# EAGLE board SparkFun_LED_Array_8x7_Panel_v11 (EAGLE 7.5.0), part 1 of 8
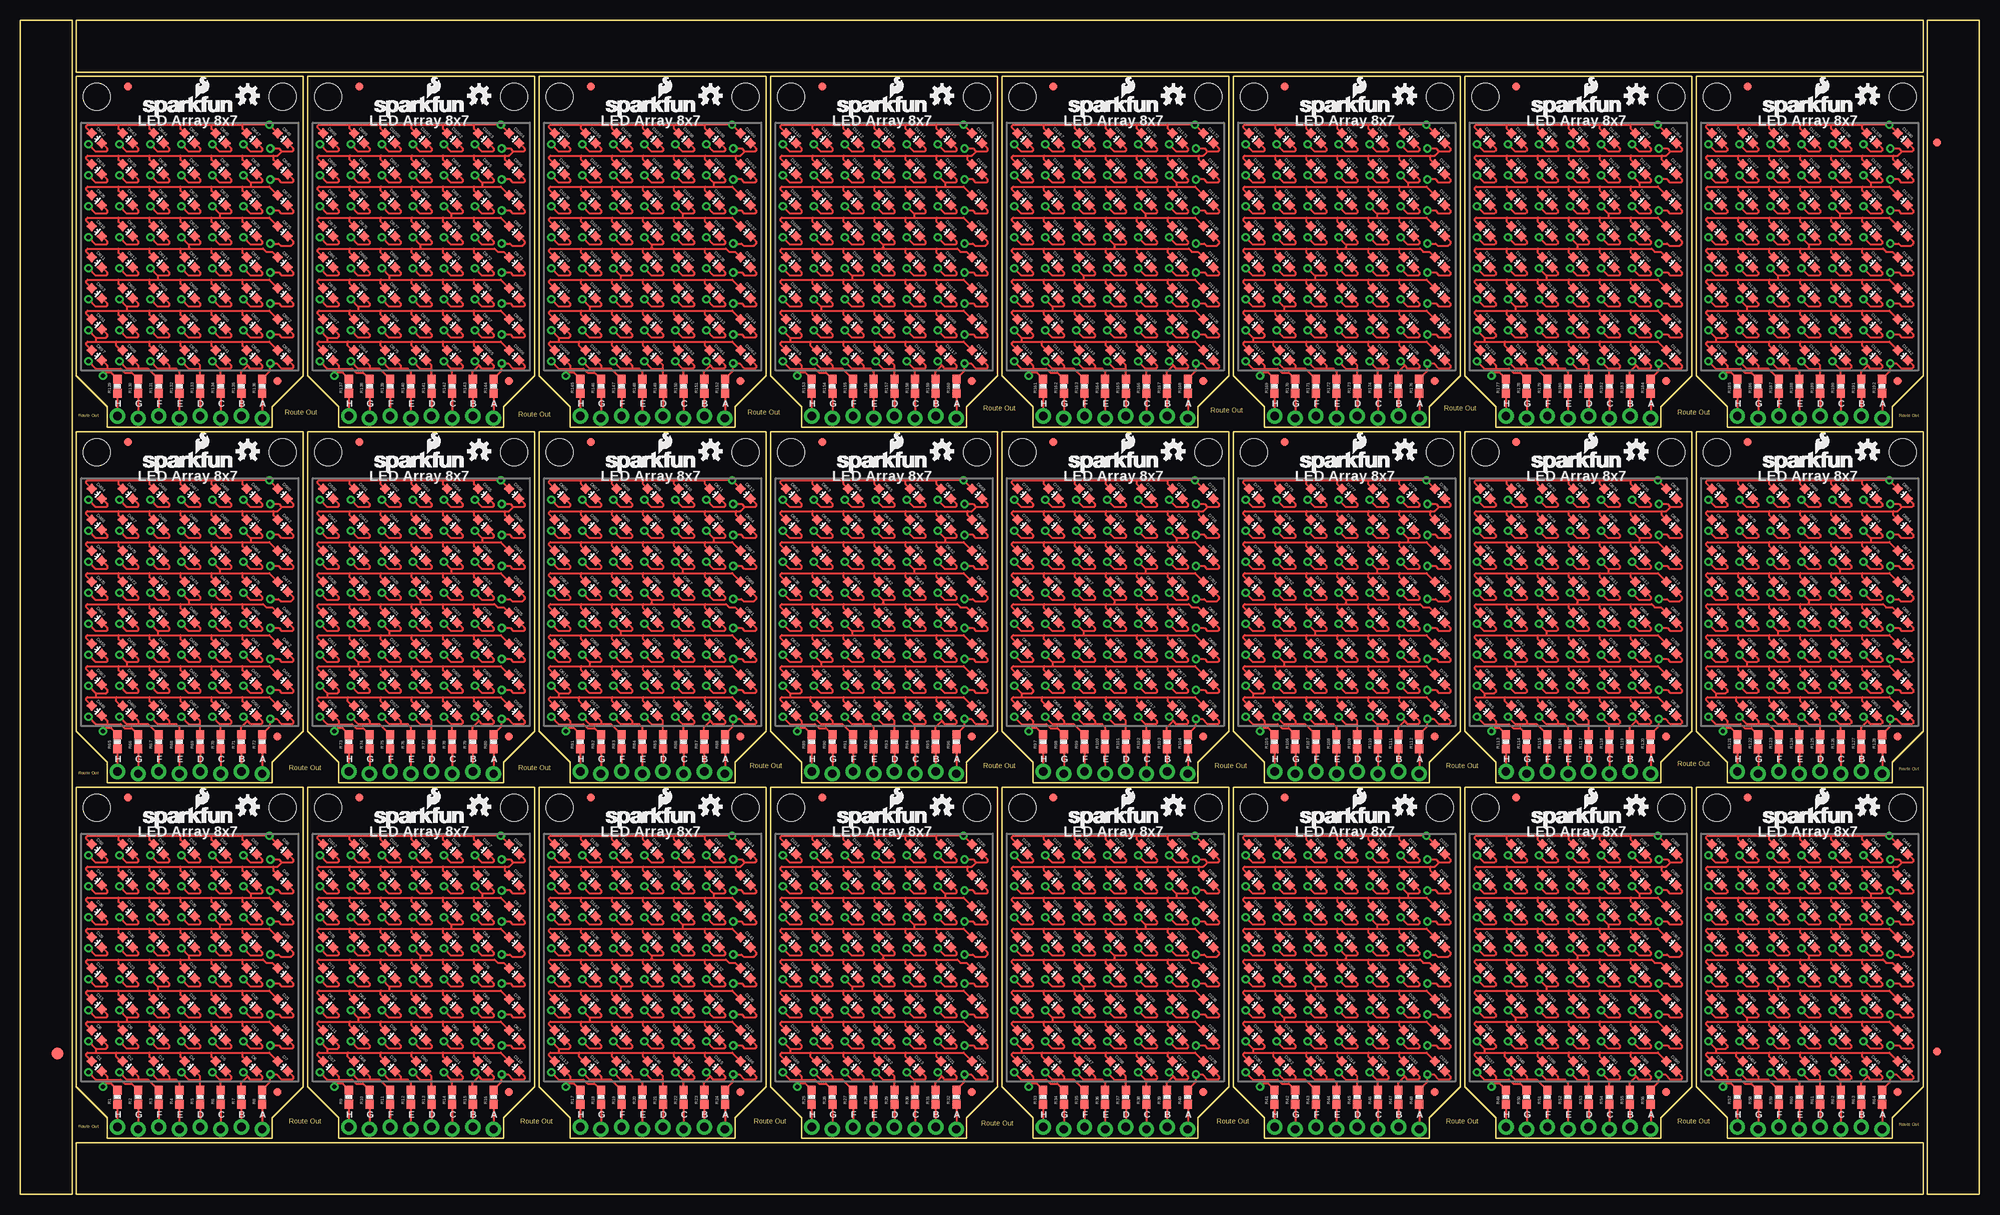
[diagram p0: board, top side]
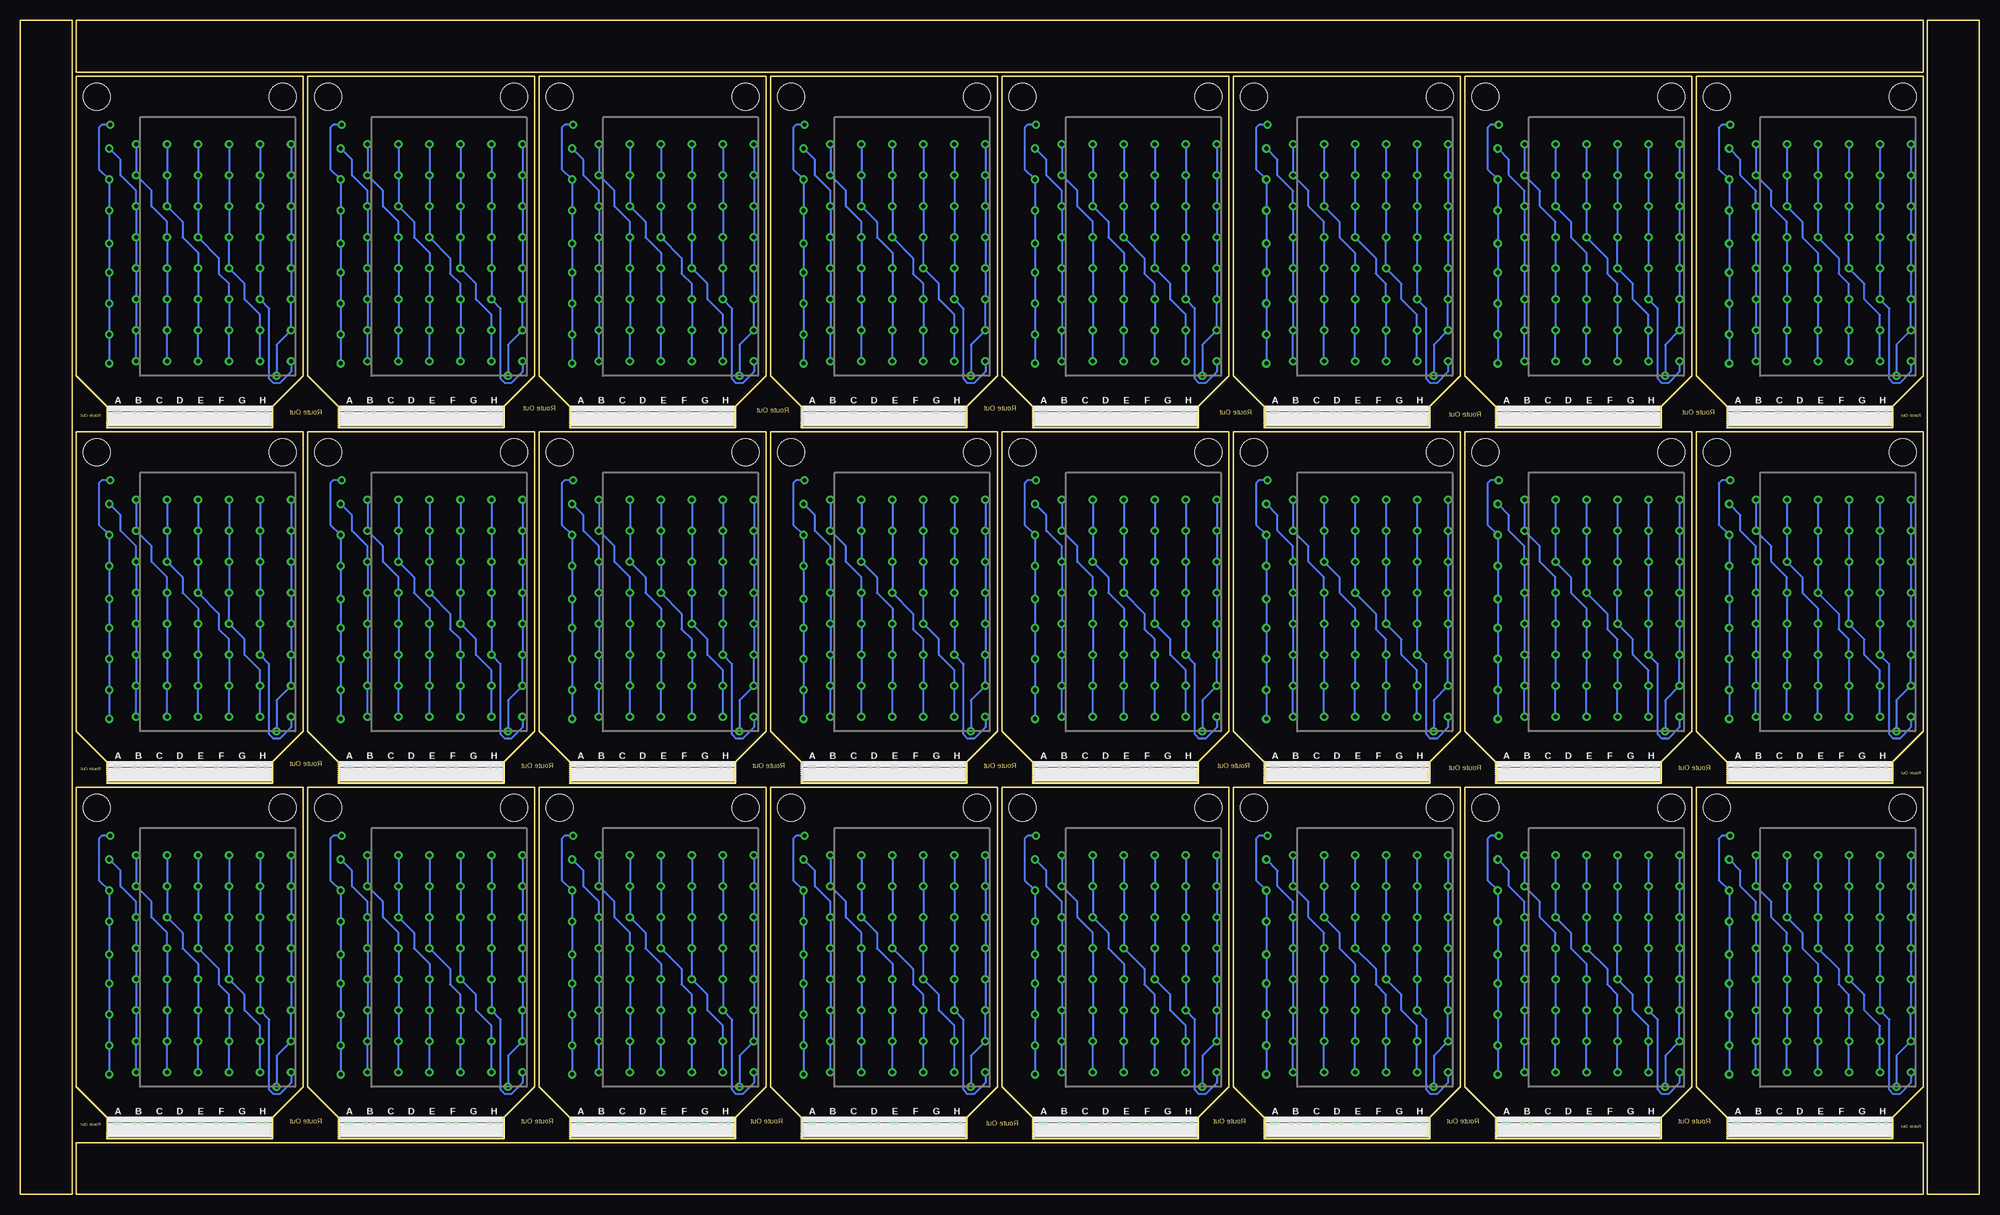
[diagram p1: board, bottom side, seen from below]

Size 240.79 x 144.27 mm. Coordinates in mm from the lower left corner, seen from the top.
Outline: 216 segments
Copper layers (1*16): Top 0.035mm / dielectric 1.5mm / Bottom 0.035mm
Design rules "SparkFun-2-layer-STANDARD": minimum track width 10mil, minimum drill 20mil, track to track 10mil, track to pad 8mil, pad to pad 8mil, via to via 10mil, smd to smd 8mil, copper to edge 8mil, drill to drill 8mil, minimum pad ring 10mil, minimum via ring 10mil, stop-mask expansion 4mil, vias tented up to drill 20mil, thermal gap 10mil

## Footprints (pad centres in the part's own frame; a part is rotated, then mirrored left to right if it is on the bottom)
LED-0603 = smd 1 x 1: A 0,-0.877; C 0,0.877
FIDUCIAL-1.5X3 = smd 1.5 x 1.5: 1 0,0
FIDUCIAL-1X2 = smd 1 x 1: 1 0,0
1X08_LOCK_NO_SILK = drill 1.016 pad 1.88: 1 0,0.127; 2 2.54,-0.127; 3 5.08,0.127; 4 7.62,-0.127; 5 10.16,0.127; 6 12.7,-0.127; 7 15.24,0.127; 8 17.78,-0.127
0603-RES = smd 1.1 x 1: 1 -0.85,0; 2 0.85,0
STAND-OFF = hole 3.302: 0,0

## Placement (x,y rotation side)
D1  RED  [LED-0603]  9.4,15.75 225 top
D2  RED  [LED-0603]  13.21,15.75 225 top
D3  RED  [LED-0603]  17.02,15.75 225 top
D4  RED  [LED-0603]  20.83,15.75 225 top
D5  RED  [LED-0603]  24.64,15.75 225 top
D6  RED  [LED-0603]  28.45,15.75 225 top
D7  RED  [LED-0603]  32.26,15.75 225 top
D8  RED  [LED-0603]  9.4,19.56 225 top
D9  RED  [LED-0603]  13.21,19.56 225 top
D10  RED  [LED-0603]  17.02,19.56 225 top
D11  RED  [LED-0603]  20.83,19.56 225 top
D12  RED  [LED-0603]  24.64,19.56 225 top
D13  RED  [LED-0603]  28.45,19.56 225 top
D14  RED  [LED-0603]  32.26,19.56 225 top
D15  RED  [LED-0603]  9.4,23.37 225 top
D16  RED  [LED-0603]  13.21,23.37 225 top
D17  RED  [LED-0603]  17.02,23.37 225 top
D18  RED  [LED-0603]  20.83,23.37 225 top
D19  RED  [LED-0603]  24.64,23.37 225 top
D20  RED  [LED-0603]  28.45,23.37 225 top
D21  RED  [LED-0603]  32.26,23.37 225 top
D22  RED  [LED-0603]  9.4,27.18 225 top
D23  RED  [LED-0603]  13.21,27.18 225 top
D24  RED  [LED-0603]  17.02,27.18 225 top
D25  RED  [LED-0603]  20.83,27.18 225 top
D26  RED  [LED-0603]  24.64,27.18 225 top
D27  RED  [LED-0603]  28.45,27.18 225 top
D28  RED  [LED-0603]  32.26,27.18 225 top
D29  RED  [LED-0603]  9.4,30.99 225 top
D30  RED  [LED-0603]  13.21,30.99 225 top
D31  RED  [LED-0603]  17.02,30.99 225 top
D32  RED  [LED-0603]  20.83,30.99 225 top
D33  RED  [LED-0603]  24.64,30.99 225 top
D34  RED  [LED-0603]  28.45,30.99 225 top
D35  RED  [LED-0603]  32.26,30.99 225 top
D36  RED  [LED-0603]  9.4,34.8 225 top
D37  RED  [LED-0603]  13.21,34.8 225 top
D38  RED  [LED-0603]  17.02,34.8 225 top
D39  RED  [LED-0603]  20.83,34.8 225 top
D40  RED  [LED-0603]  24.64,34.8 225 top
D41  RED  [LED-0603]  28.45,34.8 225 top
D42  RED  [LED-0603]  32.26,34.8 225 top
D43  RED  [LED-0603]  9.4,38.61 225 top
D44  RED  [LED-0603]  13.21,38.61 225 top
D45  RED  [LED-0603]  17.02,38.61 225 top
D46  RED  [LED-0603]  20.83,38.61 225 top
D47  RED  [LED-0603]  24.64,38.61 225 top
D48  RED  [LED-0603]  28.45,38.61 225 top
D49  RED  [LED-0603]  32.26,38.61 225 top
D50  RED  [LED-0603]  9.4,42.42 225 top
D51  RED  [LED-0603]  13.21,42.42 225 top
D52  RED  [LED-0603]  17.02,42.42 225 top
D53  RED  [LED-0603]  20.83,42.42 225 top
D54  RED  [LED-0603]  24.64,42.42 225 top
D55  RED  [LED-0603]  28.45,42.42 225 top
D56  RED  [LED-0603]  32.26,42.42 225 top
D57  RED  [LED-0603]  37.85,15.75 225 top
D58  RED  [LED-0603]  45.47,19.56 225 top
D59  RED  [LED-0603]  49.28,19.56 225 top
D60  RED  [LED-0603]  53.09,19.56 225 top
D61  RED  [LED-0603]  56.9,19.56 225 top
D62  RED  [LED-0603]  60.71,19.56 225 top
D63  RED  [LED-0603]  37.85,23.37 225 top
D64  RED  [LED-0603]  41.66,23.37 225 top
D65  RED  [LED-0603]  45.47,23.37 225 top
D66  RED  [LED-0603]  49.28,23.37 225 top
D67  RED  [LED-0603]  53.09,23.37 225 top
D68  RED  [LED-0603]  41.66,15.75 225 top
D69  RED  [LED-0603]  56.9,23.37 225 top
D70  RED  [LED-0603]  60.71,23.37 225 top
D71  RED  [LED-0603]  37.85,27.18 225 top
D72  RED  [LED-0603]  41.66,27.18 225 top
D73  RED  [LED-0603]  45.47,27.18 225 top
D74  RED  [LED-0603]  49.28,27.18 225 top
D75  RED  [LED-0603]  53.09,27.18 225 top
D76  RED  [LED-0603]  56.9,27.18 225 top
D77  RED  [LED-0603]  60.71,27.18 225 top
D78  RED  [LED-0603]  37.85,30.99 225 top
D79  RED  [LED-0603]  45.47,15.75 225 top
D80  RED  [LED-0603]  41.66,30.99 225 top
D81  RED  [LED-0603]  45.47,30.99 225 top
D82  RED  [LED-0603]  49.28,30.99 225 top
D83  RED  [LED-0603]  53.09,30.99 225 top
D84  RED  [LED-0603]  56.9,30.99 225 top
D85  RED  [LED-0603]  60.71,30.99 225 top
D86  RED  [LED-0603]  37.85,34.8 225 top
D87  RED  [LED-0603]  41.66,34.8 225 top
D88  RED  [LED-0603]  45.47,34.8 225 top
D89  RED  [LED-0603]  49.28,34.8 225 top
D90  RED  [LED-0603]  49.28,15.75 225 top
D91  RED  [LED-0603]  53.09,34.8 225 top
D92  RED  [LED-0603]  56.9,34.8 225 top
D93  RED  [LED-0603]  60.71,34.8 225 top
D94  RED  [LED-0603]  37.85,38.61 225 top
D95  RED  [LED-0603]  41.66,38.61 225 top
D96  RED  [LED-0603]  45.47,38.61 225 top
D97  RED  [LED-0603]  49.28,38.61 225 top
D98  RED  [LED-0603]  53.09,38.61 225 top
D99  RED  [LED-0603]  56.9,38.61 225 top
D100  RED  [LED-0603]  60.71,38.61 225 top
D101  RED  [LED-0603]  53.09,15.75 225 top
D102  RED  [LED-0603]  37.85,42.42 225 top
D103  RED  [LED-0603]  41.66,42.42 225 top
D104  RED  [LED-0603]  45.47,42.42 225 top
D105  RED  [LED-0603]  49.28,42.42 225 top
D106  RED  [LED-0603]  53.09,42.42 225 top
D107  RED  [LED-0603]  56.9,42.42 225 top
D108  RED  [LED-0603]  60.71,42.42 225 top
D109  RED  [LED-0603]  56.9,15.75 225 top
D110  RED  [LED-0603]  60.71,15.75 225 top
D111  RED  [LED-0603]  37.85,19.56 225 top
D112  RED  [LED-0603]  41.66,19.56 225 top
D113  RED  [LED-0603]  66.29,15.75 225 top
D114  RED  [LED-0603]  73.91,19.56 225 top
D115  RED  [LED-0603]  77.72,19.56 225 top
D116  RED  [LED-0603]  81.53,19.56 225 top
D117  RED  [LED-0603]  85.34,19.56 225 top
D118  RED  [LED-0603]  89.15,19.56 225 top
D119  RED  [LED-0603]  66.29,23.37 225 top
D120  RED  [LED-0603]  70.1,23.37 225 top
D121  RED  [LED-0603]  73.91,23.37 225 top
D122  RED  [LED-0603]  77.72,23.37 225 top
D123  RED  [LED-0603]  81.53,23.37 225 top
D124  RED  [LED-0603]  70.1,15.75 225 top
D125  RED  [LED-0603]  85.34,23.37 225 top
D126  RED  [LED-0603]  89.15,23.37 225 top
D127  RED  [LED-0603]  66.29,27.18 225 top
D128  RED  [LED-0603]  70.1,27.18 225 top
D129  RED  [LED-0603]  73.91,27.18 225 top
D130  RED  [LED-0603]  77.72,27.18 225 top
D131  RED  [LED-0603]  81.53,27.18 225 top
D132  RED  [LED-0603]  85.34,27.18 225 top
D133  RED  [LED-0603]  89.15,27.18 225 top
D134  RED  [LED-0603]  66.29,30.99 225 top
D135  RED  [LED-0603]  73.91,15.75 225 top
D136  RED  [LED-0603]  70.1,30.99 225 top
D137  RED  [LED-0603]  73.91,30.99 225 top
D138  RED  [LED-0603]  77.72,30.99 225 top
D139  RED  [LED-0603]  81.53,30.99 225 top
D140  RED  [LED-0603]  85.34,30.99 225 top
D141  RED  [LED-0603]  89.15,30.99 225 top
D142  RED  [LED-0603]  66.29,34.8 225 top
D143  RED  [LED-0603]  70.1,34.8 225 top
D144  RED  [LED-0603]  73.91,34.8 225 top
D145  RED  [LED-0603]  77.72,34.8 225 top
D146  RED  [LED-0603]  77.72,15.75 225 top
D147  RED  [LED-0603]  81.53,34.8 225 top
D148  RED  [LED-0603]  85.34,34.8 225 top
D149  RED  [LED-0603]  89.15,34.8 225 top
D150  RED  [LED-0603]  66.29,38.61 225 top
D151  RED  [LED-0603]  70.1,38.61 225 top
D152  RED  [LED-0603]  73.91,38.61 225 top
D153  RED  [LED-0603]  77.72,38.61 225 top
D154  RED  [LED-0603]  81.53,38.61 225 top
D155  RED  [LED-0603]  85.34,38.61 225 top
D156  RED  [LED-0603]  89.15,38.61 225 top
D157  RED  [LED-0603]  81.53,15.75 225 top
D158  RED  [LED-0603]  66.29,42.42 225 top
D159  RED  [LED-0603]  70.1,42.42 225 top
D160  RED  [LED-0603]  73.91,42.42 225 top
D161  RED  [LED-0603]  77.72,42.42 225 top
D162  RED  [LED-0603]  81.53,42.42 225 top
D163  RED  [LED-0603]  85.34,42.42 225 top
D164  RED  [LED-0603]  89.15,42.42 225 top
D165  RED  [LED-0603]  85.34,15.75 225 top
D166  RED  [LED-0603]  89.15,15.75 225 top
D167  RED  [LED-0603]  66.29,19.56 225 top
D168  RED  [LED-0603]  70.1,19.56 225 top
D169  RED  [LED-0603]  94.74,15.75 225 top
D170  RED  [LED-0603]  102.36,19.56 225 top
D171  RED  [LED-0603]  106.17,19.56 225 top
D172  RED  [LED-0603]  109.98,19.56 225 top
D173  RED  [LED-0603]  113.79,19.56 225 top
D174  RED  [LED-0603]  117.6,19.56 225 top
D175  RED  [LED-0603]  94.74,23.37 225 top
D176  RED  [LED-0603]  98.55,23.37 225 top
D177  RED  [LED-0603]  102.36,23.37 225 top
D178  RED  [LED-0603]  106.17,23.37 225 top
D179  RED  [LED-0603]  109.98,23.37 225 top
D180  RED  [LED-0603]  98.55,15.75 225 top
D181  RED  [LED-0603]  113.79,23.37 225 top
D182  RED  [LED-0603]  117.6,23.37 225 top
D183  RED  [LED-0603]  94.74,27.18 225 top
D184  RED  [LED-0603]  98.55,27.18 225 top
D185  RED  [LED-0603]  102.36,27.18 225 top
D186  RED  [LED-0603]  106.17,27.18 225 top
D187  RED  [LED-0603]  109.98,27.18 225 top
D188  RED  [LED-0603]  113.79,27.18 225 top
D189  RED  [LED-0603]  117.6,27.18 225 top
D190  RED  [LED-0603]  94.74,30.99 225 top
D191  RED  [LED-0603]  102.36,15.75 225 top
D192  RED  [LED-0603]  98.55,30.99 225 top
D193  RED  [LED-0603]  102.36,30.99 225 top
D194  RED  [LED-0603]  106.17,30.99 225 top
D195  RED  [LED-0603]  109.98,30.99 225 top
D196  RED  [LED-0603]  113.79,30.99 225 top
D197  RED  [LED-0603]  117.6,30.99 225 top
D198  RED  [LED-0603]  94.74,34.8 225 top
D199  RED  [LED-0603]  98.55,34.8 225 top
D200  RED  [LED-0603]  102.36,34.8 225 top
D201  RED  [LED-0603]  106.17,34.8 225 top
D202  RED  [LED-0603]  106.17,15.75 225 top
D203  RED  [LED-0603]  109.98,34.8 225 top
D204  RED  [LED-0603]  113.79,34.8 225 top
D205  RED  [LED-0603]  117.6,34.8 225 top
D206  RED  [LED-0603]  94.74,38.61 225 top
D207  RED  [LED-0603]  98.55,38.61 225 top
D208  RED  [LED-0603]  102.36,38.61 225 top
D209  RED  [LED-0603]  106.17,38.61 225 top
D210  RED  [LED-0603]  109.98,38.61 225 top
D211  RED  [LED-0603]  113.79,38.61 225 top
D212  RED  [LED-0603]  117.6,38.61 225 top
D213  RED  [LED-0603]  109.98,15.75 225 top
D214  RED  [LED-0603]  94.74,42.42 225 top
D215  RED  [LED-0603]  98.55,42.42 225 top
D216  RED  [LED-0603]  102.36,42.42 225 top
D217  RED  [LED-0603]  106.17,42.42 225 top
D218  RED  [LED-0603]  109.98,42.42 225 top
D219  RED  [LED-0603]  113.79,42.42 225 top
D220  RED  [LED-0603]  117.6,42.42 225 top
D221  RED  [LED-0603]  113.79,15.75 225 top
D222  RED  [LED-0603]  117.6,15.75 225 top
D223  RED  [LED-0603]  94.74,19.56 225 top
D224  RED  [LED-0603]  98.55,19.56 225 top
D225  RED  [LED-0603]  123.19,15.75 225 top
D226  RED  [LED-0603]  130.81,19.56 225 top
D227  RED  [LED-0603]  134.62,19.56 225 top
D228  RED  [LED-0603]  138.43,19.56 225 top
D229  RED  [LED-0603]  142.24,19.56 225 top
D230  RED  [LED-0603]  146.05,19.56 225 top
D231  RED  [LED-0603]  123.19,23.37 225 top
D232  RED  [LED-0603]  127,23.37 225 top
D233  RED  [LED-0603]  130.81,23.37 225 top
D234  RED  [LED-0603]  134.62,23.37 225 top
D235  RED  [LED-0603]  138.43,23.37 225 top
D236  RED  [LED-0603]  127,15.75 225 top
D237  RED  [LED-0603]  142.24,23.37 225 top
D238  RED  [LED-0603]  146.05,23.37 225 top
D239  RED  [LED-0603]  123.19,27.18 225 top
D240  RED  [LED-0603]  127,27.18 225 top
D241  RED  [LED-0603]  130.81,27.18 225 top
D242  RED  [LED-0603]  134.62,27.18 225 top
D243  RED  [LED-0603]  138.43,27.18 225 top
D244  RED  [LED-0603]  142.24,27.18 225 top
D245  RED  [LED-0603]  146.05,27.18 225 top
D246  RED  [LED-0603]  123.19,30.99 225 top
D247  RED  [LED-0603]  130.81,15.75 225 top
D248  RED  [LED-0603]  127,30.99 225 top
D249  RED  [LED-0603]  130.81,30.99 225 top
D250  RED  [LED-0603]  134.62,30.99 225 top
D251  RED  [LED-0603]  138.43,30.99 225 top
D252  RED  [LED-0603]  142.24,30.99 225 top
D253  RED  [LED-0603]  146.05,30.99 225 top
D254  RED  [LED-0603]  123.19,34.8 225 top
D255  RED  [LED-0603]  127,34.8 225 top
D256  RED  [LED-0603]  130.81,34.8 225 top
D257  RED  [LED-0603]  134.62,34.8 225 top
D258  RED  [LED-0603]  134.62,15.75 225 top
D259  RED  [LED-0603]  138.43,34.8 225 top
D260  RED  [LED-0603]  142.24,34.8 225 top
D261  RED  [LED-0603]  146.05,34.8 225 top
D262  RED  [LED-0603]  123.19,38.61 225 top
D263  RED  [LED-0603]  127,38.61 225 top
D264  RED  [LED-0603]  130.81,38.61 225 top
D265  RED  [LED-0603]  134.62,38.61 225 top
D266  RED  [LED-0603]  138.43,38.61 225 top
D267  RED  [LED-0603]  142.24,38.61 225 top
D268  RED  [LED-0603]  146.05,38.61 225 top
D269  RED  [LED-0603]  138.43,15.75 225 top
D270  RED  [LED-0603]  123.19,42.42 225 top
D271  RED  [LED-0603]  127,42.42 225 top
D272  RED  [LED-0603]  130.81,42.42 225 top
D273  RED  [LED-0603]  134.62,42.42 225 top
D274  RED  [LED-0603]  138.43,42.42 225 top
D275  RED  [LED-0603]  142.24,42.42 225 top
D276  RED  [LED-0603]  146.05,42.42 225 top
D277  RED  [LED-0603]  142.24,15.75 225 top
D278  RED  [LED-0603]  146.05,15.75 225 top
D279  RED  [LED-0603]  123.19,19.56 225 top
D280  RED  [LED-0603]  127,19.56 225 top
D281  RED  [LED-0603]  151.64,15.75 225 top
D282  RED  [LED-0603]  159.26,19.56 225 top
D283  RED  [LED-0603]  163.07,19.56 225 top
D284  RED  [LED-0603]  166.88,19.56 225 top
D285  RED  [LED-0603]  170.69,19.56 225 top
D286  RED  [LED-0603]  174.5,19.56 225 top
D287  RED  [LED-0603]  151.64,23.37 225 top
D288  RED  [LED-0603]  155.45,23.37 225 top
D289  RED  [LED-0603]  159.26,23.37 225 top
D290  RED  [LED-0603]  163.07,23.37 225 top
D291  RED  [LED-0603]  166.88,23.37 225 top
D292  RED  [LED-0603]  155.45,15.75 225 top
D293  RED  [LED-0603]  170.69,23.37 225 top
D294  RED  [LED-0603]  174.5,23.37 225 top
D295  RED  [LED-0603]  151.64,27.18 225 top
D296  RED  [LED-0603]  155.45,27.18 225 top
D297  RED  [LED-0603]  159.26,27.18 225 top
D298  RED  [LED-0603]  163.07,27.18 225 top
D299  RED  [LED-0603]  166.88,27.18 225 top
D300  RED  [LED-0603]  170.69,27.18 225 top
D301  RED  [LED-0603]  174.5,27.18 225 top
D302  RED  [LED-0603]  151.64,30.99 225 top
D303  RED  [LED-0603]  159.26,15.75 225 top
D304  RED  [LED-0603]  155.45,30.99 225 top
D305  RED  [LED-0603]  159.26,30.99 225 top
D306  RED  [LED-0603]  163.07,30.99 225 top
D307  RED  [LED-0603]  166.88,30.99 225 top
D308  RED  [LED-0603]  170.69,30.99 225 top
D309  RED  [LED-0603]  174.5,30.99 225 top
D310  RED  [LED-0603]  151.64,34.8 225 top
D311  RED  [LED-0603]  155.45,34.8 225 top
D312  RED  [LED-0603]  159.26,34.8 225 top
D313  RED  [LED-0603]  163.07,34.8 225 top
D314  RED  [LED-0603]  163.07,15.75 225 top
D315  RED  [LED-0603]  166.88,34.8 225 top
D316  RED  [LED-0603]  170.69,34.8 225 top
D317  RED  [LED-0603]  174.5,34.8 225 top
D318  RED  [LED-0603]  151.64,38.61 225 top
D319  RED  [LED-0603]  155.45,38.61 225 top
D320  RED  [LED-0603]  159.26,38.61 225 top
D321  RED  [LED-0603]  163.07,38.61 225 top
D322  RED  [LED-0603]  166.88,38.61 225 top
D323  RED  [LED-0603]  170.69,38.61 225 top
D324  RED  [LED-0603]  174.5,38.61 225 top
D325  RED  [LED-0603]  166.88,15.75 225 top
D326  RED  [LED-0603]  151.64,42.42 225 top
D327  RED  [LED-0603]  155.45,42.42 225 top
D328  RED  [LED-0603]  159.26,42.42 225 top
D329  RED  [LED-0603]  163.07,42.42 225 top
D330  RED  [LED-0603]  166.88,42.42 225 top
D331  RED  [LED-0603]  170.69,42.42 225 top
D332  RED  [LED-0603]  174.5,42.42 225 top
D333  RED  [LED-0603]  170.69,15.75 225 top
D334  RED  [LED-0603]  174.5,15.75 225 top
D335  RED  [LED-0603]  151.64,19.56 225 top
D336  RED  [LED-0603]  155.45,19.56 225 top
D337  RED  [LED-0603]  180.09,15.75 225 top
D338  RED  [LED-0603]  187.71,19.56 225 top
D339  RED  [LED-0603]  191.52,19.56 225 top
D340  RED  [LED-0603]  195.33,19.56 225 top
D341  RED  [LED-0603]  199.14,19.56 225 top
D342  RED  [LED-0603]  202.95,19.56 225 top
D343  RED  [LED-0603]  180.09,23.37 225 top
D344  RED  [LED-0603]  183.9,23.37 225 top
D345  RED  [LED-0603]  187.71,23.37 225 top
D346  RED  [LED-0603]  191.52,23.37 225 top
D347  RED  [LED-0603]  195.33,23.37 225 top
D348  RED  [LED-0603]  183.9,15.75 225 top
D349  RED  [LED-0603]  199.14,23.37 225 top
D350  RED  [LED-0603]  202.95,23.37 225 top
D351  RED  [LED-0603]  180.09,27.18 225 top
D352  RED  [LED-0603]  183.9,27.18 225 top
D353  RED  [LED-0603]  187.71,27.18 225 top
D354  RED  [LED-0603]  191.52,27.18 225 top
D355  RED  [LED-0603]  195.33,27.18 225 top
D356  RED  [LED-0603]  199.14,27.18 225 top
D357  RED  [LED-0603]  202.95,27.18 225 top
D358  RED  [LED-0603]  180.09,30.99 225 top
D359  RED  [LED-0603]  187.71,15.75 225 top
D360  RED  [LED-0603]  183.9,30.99 225 top
D361  RED  [LED-0603]  187.71,30.99 225 top
D362  RED  [LED-0603]  191.52,30.99 225 top
D363  RED  [LED-0603]  195.33,30.99 225 top
D364  RED  [LED-0603]  199.14,30.99 225 top
D365  RED  [LED-0603]  202.95,30.99 225 top
D366  RED  [LED-0603]  180.09,34.8 225 top
D367  RED  [LED-0603]  183.9,34.8 225 top
D368  RED  [LED-0603]  187.71,34.8 225 top
D369  RED  [LED-0603]  191.52,34.8 225 top
D370  RED  [LED-0603]  191.52,15.75 225 top
D371  RED  [LED-0603]  195.33,34.8 225 top
D372  RED  [LED-0603]  199.14,34.8 225 top
D373  RED  [LED-0603]  202.95,34.8 225 top
D374  RED  [LED-0603]  180.09,38.61 225 top
D375  RED  [LED-0603]  183.9,38.61 225 top
D376  RED  [LED-0603]  187.71,38.61 225 top
D377  RED  [LED-0603]  191.52,38.61 225 top
D378  RED  [LED-0603]  195.33,38.61 225 top
D379  RED  [LED-0603]  199.14,38.61 225 top
D380  RED  [LED-0603]  202.95,38.61 225 top
D381  RED  [LED-0603]  195.33,15.75 225 top
D382  RED  [LED-0603]  180.09,42.42 225 top
D383  RED  [LED-0603]  183.9,42.42 225 top
D384  RED  [LED-0603]  187.71,42.42 225 top
D385  RED  [LED-0603]  191.52,42.42 225 top
D386  RED  [LED-0603]  195.33,42.42 225 top
D387  RED  [LED-0603]  199.14,42.42 225 top
D388  RED  [LED-0603]  202.95,42.42 225 top
D389  RED  [LED-0603]  199.14,15.75 225 top
D390  RED  [LED-0603]  202.95,15.75 225 top
D391  RED  [LED-0603]  180.09,19.56 225 top
D392  RED  [LED-0603]  183.9,19.56 225 top
D393  RED  [LED-0603]  208.53,15.75 225 top
D394  RED  [LED-0603]  216.15,19.56 225 top
D395  RED  [LED-0603]  219.96,19.56 225 top
D396  RED  [LED-0603]  223.77,19.56 225 top
D397  RED  [LED-0603]  227.58,19.56 225 top
D398  RED  [LED-0603]  231.39,19.56 225 top
D399  RED  [LED-0603]  208.53,23.37 225 top
D400  RED  [LED-0603]  212.34,23.37 225 top
D401  RED  [LED-0603]  216.15,23.37 225 top
D402  RED  [LED-0603]  219.96,23.37 225 top
D403  RED  [LED-0603]  223.77,23.37 225 top
D404  RED  [LED-0603]  212.34,15.75 225 top
D405  RED  [LED-0603]  227.58,23.37 225 top
D406  RED  [LED-0603]  231.39,23.37 225 top
D407  RED  [LED-0603]  208.53,27.18 225 top
D408  RED  [LED-0603]  212.34,27.18 225 top
D409  RED  [LED-0603]  216.15,27.18 225 top
D410  RED  [LED-0603]  219.96,27.18 225 top
D411  RED  [LED-0603]  223.77,27.18 225 top
D412  RED  [LED-0603]  227.58,27.18 225 top
D413  RED  [LED-0603]  231.39,27.18 225 top
D414  RED  [LED-0603]  208.53,30.99 225 top
D415  RED  [LED-0603]  216.15,15.75 225 top
D416  RED  [LED-0603]  212.34,30.99 225 top
D417  RED  [LED-0603]  216.15,30.99 225 top
D418  RED  [LED-0603]  219.96,30.99 225 top
D419  RED  [LED-0603]  223.77,30.99 225 top
D420  RED  [LED-0603]  227.58,30.99 225 top
D421  RED  [LED-0603]  231.39,30.99 225 top
D422  RED  [LED-0603]  208.53,34.8 225 top
D423  RED  [LED-0603]  212.34,34.8 225 top
D424  RED  [LED-0603]  216.15,34.8 225 top
D425  RED  [LED-0603]  219.96,34.8 225 top
D426  RED  [LED-0603]  219.96,15.75 225 top
D427  RED  [LED-0603]  223.77,34.8 225 top
D428  RED  [LED-0603]  227.58,34.8 225 top
D429  RED  [LED-0603]  231.39,34.8 225 top
D430  RED  [LED-0603]  208.53,38.61 225 top
D431  RED  [LED-0603]  212.34,38.61 225 top
D432  RED  [LED-0603]  216.15,38.61 225 top
D433  RED  [LED-0603]  219.96,38.61 225 top
D434  RED  [LED-0603]  223.77,38.61 225 top
D435  RED  [LED-0603]  227.58,38.61 225 top
D436  RED  [LED-0603]  231.39,38.61 225 top
D437  RED  [LED-0603]  223.77,15.75 225 top
D438  RED  [LED-0603]  208.53,42.42 225 top
D439  RED  [LED-0603]  212.34,42.42 225 top
D440  RED  [LED-0603]  216.15,42.42 225 top
D441  RED  [LED-0603]  219.96,42.42 225 top
D442  RED  [LED-0603]  223.77,42.42 225 top
D443  RED  [LED-0603]  227.58,42.42 225 top
D444  RED  [LED-0603]  231.39,42.42 225 top
D445  RED  [LED-0603]  227.58,15.75 225 top
D446  RED  [LED-0603]  231.39,15.75 225 top
D447  RED  [LED-0603]  208.53,19.56 225 top
D448  RED  [LED-0603]  212.34,19.56 225 top
D449  RED  [LED-0603]  9.4,59.44 225 top
D450  RED  [LED-0603]  17.02,63.25 225 top
D451  RED  [LED-0603]  20.83,63.25 225 top
D452  RED  [LED-0603]  24.64,63.25 225 top
D453  RED  [LED-0603]  28.45,63.25 225 top
D454  RED  [LED-0603]  32.26,63.25 225 top
D455  RED  [LED-0603]  9.4,67.06 225 top
D456  RED  [LED-0603]  13.21,67.06 225 top
D457  RED  [LED-0603]  17.02,67.06 225 top
D458  RED  [LED-0603]  20.83,67.06 225 top
D459  RED  [LED-0603]  24.64,67.06 225 top
D460  RED  [LED-0603]  13.21,59.44 225 top
D461  RED  [LED-0603]  28.45,67.06 225 top
D462  RED  [LED-0603]  32.26,67.06 225 top
D463  RED  [LED-0603]  9.4,70.87 225 top
D464  RED  [LED-0603]  13.21,70.87 225 top
D465  RED  [LED-0603]  17.02,70.87 225 top
D466  RED  [LED-0603]  20.83,70.87 225 top
D467  RED  [LED-0603]  24.64,70.87 225 top
D468  RED  [LED-0603]  28.45,70.87 225 top
D469  RED  [LED-0603]  32.26,70.87 225 top
D470  RED  [LED-0603]  9.4,74.68 225 top
D471  RED  [LED-0603]  17.02,59.44 225 top
D472  RED  [LED-0603]  13.21,74.68 225 top
D473  RED  [LED-0603]  17.02,74.68 225 top
D474  RED  [LED-0603]  20.83,74.68 225 top
D475  RED  [LED-0603]  24.64,74.68 225 top
D476  RED  [LED-0603]  28.45,74.68 225 top
D477  RED  [LED-0603]  32.26,74.68 225 top
D478  RED  [LED-0603]  9.4,78.49 225 top
D479  RED  [LED-0603]  13.21,78.49 225 top
D480  RED  [LED-0603]  17.02,78.49 225 top
D481  RED  [LED-0603]  20.83,78.49 225 top
D482  RED  [LED-0603]  20.83,59.44 225 top
D483  RED  [LED-0603]  24.64,78.49 225 top
D484  RED  [LED-0603]  28.45,78.49 225 top
D485  RED  [LED-0603]  32.26,78.49 225 top
D486  RED  [LED-0603]  9.4,82.3 225 top
D487  RED  [LED-0603]  13.21,82.3 225 top
D488  RED  [LED-0603]  17.02,82.3 225 top
D489  RED  [LED-0603]  20.83,82.3 225 top
D490  RED  [LED-0603]  24.64,82.3 225 top
D491  RED  [LED-0603]  28.45,82.3 225 top
D492  RED  [LED-0603]  32.26,82.3 225 top
D493  RED  [LED-0603]  24.64,59.44 225 top
D494  RED  [LED-0603]  9.4,86.11 225 top
D495  RED  [LED-0603]  13.21,86.11 225 top
D496  RED  [LED-0603]  17.02,86.11 225 top
D497  RED  [LED-0603]  20.83,86.11 225 top
D498  RED  [LED-0603]  24.64,86.11 225 top
D499  RED  [LED-0603]  28.45,86.11 225 top
D500  RED  [LED-0603]  32.26,86.11 225 top
D501  RED  [LED-0603]  28.45,59.44 225 top
D502  RED  [LED-0603]  32.26,59.44 225 top
D503  RED  [LED-0603]  9.4,63.25 225 top
D504  RED  [LED-0603]  13.21,63.25 225 top
D505  RED  [LED-0603]  37.85,59.44 225 top
D506  RED  [LED-0603]  45.47,63.25 225 top
D507  RED  [LED-0603]  49.28,63.25 225 top
D508  RED  [LED-0603]  53.09,63.25 225 top
D509  RED  [LED-0603]  56.9,63.25 225 top
D510  RED  [LED-0603]  60.71,63.25 225 top
D511  RED  [LED-0603]  37.85,67.06 225 top
D512  RED  [LED-0603]  41.66,67.06 225 top
D513  RED  [LED-0603]  45.47,67.06 225 top
D514  RED  [LED-0603]  49.28,67.06 225 top
D515  RED  [LED-0603]  53.09,67.06 225 top
D516  RED  [LED-0603]  41.66,59.44 225 top
D517  RED  [LED-0603]  56.9,67.06 225 top
D518  RED  [LED-0603]  60.71,67.06 225 top
D519  RED  [LED-0603]  37.85,70.87 225 top
D520  RED  [LED-0603]  41.66,70.87 225 top
D521  RED  [LED-0603]  45.47,70.87 225 top
D522  RED  [LED-0603]  49.28,70.87 225 top
D523  RED  [LED-0603]  53.09,70.87 225 top
D524  RED  [LED-0603]  56.9,70.87 225 top
D525  RED  [LED-0603]  60.71,70.87 225 top
D526  RED  [LED-0603]  37.85,74.68 225 top
D527  RED  [LED-0603]  45.47,59.44 225 top
D528  RED  [LED-0603]  41.66,74.68 225 top
D529  RED  [LED-0603]  45.47,74.68 225 top
D530  RED  [LED-0603]  49.28,74.68 225 top
D531  RED  [LED-0603]  53.09,74.68 225 top
D532  RED  [LED-0603]  56.9,74.68 225 top
D533  RED  [LED-0603]  60.71,74.68 225 top
D534  RED  [LED-0603]  37.85,78.49 225 top
D535  RED  [LED-0603]  41.66,78.49 225 top
D536  RED  [LED-0603]  45.47,78.49 225 top
D537  RED  [LED-0603]  49.28,78.49 225 top
D538  RED  [LED-0603]  49.28,59.44 225 top
D539  RED  [LED-0603]  53.09,78.49 225 top
D540  RED  [LED-0603]  56.9,78.49 225 top
D541  RED  [LED-0603]  60.71,78.49 225 top
D542  RED  [LED-0603]  37.85,82.3 225 top
D543  RED  [LED-0603]  41.66,82.3 225 top
D544  RED  [LED-0603]  45.47,82.3 225 top
D545  RED  [LED-0603]  49.28,82.3 225 top
D546  RED  [LED-0603]  53.09,82.3 225 top
D547  RED  [LED-0603]  56.9,82.3 225 top
D548  RED  [LED-0603]  60.71,82.3 225 top
D549  RED  [LED-0603]  53.09,59.44 225 top
D550  RED  [LED-0603]  37.85,86.11 225 top
D551  RED  [LED-0603]  41.66,86.11 225 top
D552  RED  [LED-0603]  45.47,86.11 225 top
D553  RED  [LED-0603]  49.28,86.11 225 top
D554  RED  [LED-0603]  53.09,86.11 225 top
D555  RED  [LED-0603]  56.9,86.11 225 top
D556  RED  [LED-0603]  60.71,86.11 225 top
D557  RED  [LED-0603]  56.9,59.44 225 top
D558  RED  [LED-0603]  60.71,59.44 225 top
D559  RED  [LED-0603]  37.85,63.25 225 top
D560  RED  [LED-0603]  41.66,63.25 225 top
D561  RED  [LED-0603]  66.29,59.44 225 top
D562  RED  [LED-0603]  73.91,63.25 225 top
D563  RED  [LED-0603]  77.72,63.25 225 top
D564  RED  [LED-0603]  81.53,63.25 225 top
D565  RED  [LED-0603]  85.34,63.25 225 top
D566  RED  [LED-0603]  89.15,63.25 225 top
D567  RED  [LED-0603]  66.29,67.06 225 top
D568  RED  [LED-0603]  70.1,67.06 225 top
D569  RED  [LED-0603]  73.91,67.06 225 top
D570  RED  [LED-0603]  77.72,67.06 225 top
D571  RED  [LED-0603]  81.53,67.06 225 top
D572  RED  [LED-0603]  70.1,59.44 225 top
D573  RED  [LED-0603]  85.34,67.06 225 top
D574  RED  [LED-0603]  89.15,67.06 225 top
D575  RED  [LED-0603]  66.29,70.87 225 top
D576  RED  [LED-0603]  70.1,70.87 225 top
D577  RED  [LED-0603]  73.91,70.87 225 top
D578  RED  [LED-0603]  77.72,70.87 225 top
D579  RED  [LED-0603]  81.53,70.87 225 top
D580  RED  [LED-0603]  85.34,70.87 225 top
D581  RED  [LED-0603]  89.15,70.87 225 top
D582  RED  [LED-0603]  66.29,74.68 225 top
D583  RED  [LED-0603]  73.91,59.44 225 top
D584  RED  [LED-0603]  70.1,74.68 225 top
D585  RED  [LED-0603]  73.91,74.68 225 top
D586  RED  [LED-0603]  77.72,74.68 225 top
D587  RED  [LED-0603]  81.53,74.68 225 top
D588  RED  [LED-0603]  85.34,74.68 225 top
D589  RED  [LED-0603]  89.15,74.68 225 top
D590  RED  [LED-0603]  66.29,78.49 225 top
D591  RED  [LED-0603]  70.1,78.49 225 top
D592  RED  [LED-0603]  73.91,78.49 225 top
D593  RED  [LED-0603]  77.72,78.49 225 top
D594  RED  [LED-0603]  77.72,59.44 225 top
D595  RED  [LED-0603]  81.53,78.49 225 top
D596  RED  [LED-0603]  85.34,78.49 225 top
D597  RED  [LED-0603]  89.15,78.49 225 top
D598  RED  [LED-0603]  66.29,82.3 225 top
D599  RED  [LED-0603]  70.1,82.3 225 top
D600  RED  [LED-0603]  73.91,82.3 225 top
D601  RED  [LED-0603]  77.72,82.3 225 top
D602  RED  [LED-0603]  81.53,82.3 225 top
D603  RED  [LED-0603]  85.34,82.3 225 top
D604  RED  [LED-0603]  89.15,82.3 225 top
D605  RED  [LED-0603]  81.53,59.44 225 top
D606  RED  [LED-0603]  66.29,86.11 225 top
D607  RED  [LED-0603]  70.1,86.11 225 top
D608  RED  [LED-0603]  73.91,86.11 225 top
D609  RED  [LED-0603]  77.72,86.11 225 top
D610  RED  [LED-0603]  81.53,86.11 225 top
D611  RED  [LED-0603]  85.34,86.11 225 top
D612  RED  [LED-0603]  89.15,86.11 225 top
D613  RED  [LED-0603]  85.34,59.44 225 top
D614  RED  [LED-0603]  89.15,59.44 225 top
D615  RED  [LED-0603]  66.29,63.25 225 top
D616  RED  [LED-0603]  70.1,63.25 225 top
D617  RED  [LED-0603]  94.74,59.44 225 top
D618  RED  [LED-0603]  102.36,63.25 225 top
D619  RED  [LED-0603]  106.17,63.25 225 top
D620  RED  [LED-0603]  109.98,63.25 225 top
D621  RED  [LED-0603]  113.79,63.25 225 top
D622  RED  [LED-0603]  117.6,63.25 225 top
D623  RED  [LED-0603]  94.74,67.06 225 top
D624  RED  [LED-0603]  98.55,67.06 225 top
D625  RED  [LED-0603]  102.36,67.06 225 top
D626  RED  [LED-0603]  106.17,67.06 225 top
D627  RED  [LED-0603]  109.98,67.06 225 top
D628  RED  [LED-0603]  98.55,59.44 225 top
D629  RED  [LED-0603]  113.79,67.06 225 top
D630  RED  [LED-0603]  117.6,67.06 225 top
D631  RED  [LED-0603]  94.74,70.87 225 top
D632  RED  [LED-0603]  98.55,70.87 225 top
D633  RED  [LED-0603]  102.36,70.87 225 top
D634  RED  [LED-0603]  106.17,70.87 225 top
D635  RED  [LED-0603]  109.98,70.87 225 top
D636  RED  [LED-0603]  113.79,70.87 225 top
D637  RED  [LED-0603]  117.6,70.87 225 top
D638  RED  [LED-0603]  94.74,74.68 225 top
D639  RED  [LED-0603]  102.36,59.44 225 top
D640  RED  [LED-0603]  98.55,74.68 225 top
D641  RED  [LED-0603]  102.36,74.68 225 top
D642  RED  [LED-0603]  106.17,74.68 225 top
D643  RED  [LED-0603]  109.98,74.68 225 top
D644  RED  [LED-0603]  113.79,74.68 225 top
D645  RED  [LED-0603]  117.6,74.68 225 top
D646  RED  [LED-0603]  94.74,78.49 225 top
D647  RED  [LED-0603]  98.55,78.49 225 top
D648  RED  [LED-0603]  102.36,78.49 225 top
D649  RED  [LED-0603]  106.17,78.49 225 top
D650  RED  [LED-0603]  106.17,59.44 225 top
D651  RED  [LED-0603]  109.98,78.49 225 top
D652  RED  [LED-0603]  113.79,78.49 225 top
D653  RED  [LED-0603]  117.6,78.49 225 top
D654  RED  [LED-0603]  94.74,82.3 225 top
D655  RED  [LED-0603]  98.55,82.3 225 top
D656  RED  [LED-0603]  102.36,82.3 225 top
D657  RED  [LED-0603]  106.17,82.3 225 top
D658  RED  [LED-0603]  109.98,82.3 225 top
D659  RED  [LED-0603]  113.79,82.3 225 top
D660  RED  [LED-0603]  117.6,82.3 225 top
D661  RED  [LED-0603]  109.98,59.44 225 top
D662  RED  [LED-0603]  94.74,86.11 225 top
D663  RED  [LED-0603]  98.55,86.11 225 top
D664  RED  [LED-0603]  102.36,86.11 225 top
D665  RED  [LED-0603]  106.17,86.11 225 top
D666  RED  [LED-0603]  109.98,86.11 225 top
D667  RED  [LED-0603]  113.79,86.11 225 top
D668  RED  [LED-0603]  117.6,86.11 225 top
D669  RED  [LED-0603]  113.79,59.44 225 top
D670  RED  [LED-0603]  117.6,59.44 225 top
D671  RED  [LED-0603]  94.74,63.25 225 top
D672  RED  [LED-0603]  98.55,63.25 225 top
D673  RED  [LED-0603]  123.19,59.44 225 top
D674  RED  [LED-0603]  130.81,63.25 225 top
D675  RED  [LED-0603]  134.62,63.25 225 top
D676  RED  [LED-0603]  138.43,63.25 225 top
D677  RED  [LED-0603]  142.24,63.25 225 top
D678  RED  [LED-0603]  146.05,63.25 225 top
D679  RED  [LED-0603]  123.19,67.06 225 top
D680  RED  [LED-0603]  127,67.06 225 top
D681  RED  [LED-0603]  130.81,67.06 225 top
D682  RED  [LED-0603]  134.62,67.06 225 top
D683  RED  [LED-0603]  138.43,67.06 225 top
D684  RED  [LED-0603]  127,59.44 225 top
D685  RED  [LED-0603]  142.24,67.06 225 top
D686  RED  [LED-0603]  146.05,67.06 225 top
D687  RED  [LED-0603]  123.19,70.87 225 top
D688  RED  [LED-0603]  127,70.87 225 top
D689  RED  [LED-0603]  130.81,70.87 225 top
D690  RED  [LED-0603]  134.62,70.87 225 top
D691  RED  [LED-0603]  138.43,70.87 225 top
D692  RED  [LED-0603]  142.24,70.87 225 top
D693  RED  [LED-0603]  146.05,70.87 225 top
D694  RED  [LED-0603]  123.19,74.68 225 top
D695  RED  [LED-0603]  130.81,59.44 225 top
D696  RED  [LED-0603]  127,74.68 225 top
D697  RED  [LED-0603]  130.81,74.68 225 top
D698  RED  [LED-0603]  134.62,74.68 225 top
D699  RED  [LED-0603]  138.43,74.68 225 top
D700  RED  [LED-0603]  142.24,74.68 225 top
D701  RED  [LED-0603]  146.05,74.68 225 top
D702  RED  [LED-0603]  123.19,78.49 225 top
D703  RED  [LED-0603]  127,78.49 225 top
D704  RED  [LED-0603]  130.81,78.49 225 top
D705  RED  [LED-0603]  134.62,78.49 225 top
D706  RED  [LED-0603]  134.62,59.44 225 top
D707  RED  [LED-0603]  138.43,78.49 225 top
D708  RED  [LED-0603]  142.24,78.49 225 top
D709  RED  [LED-0603]  146.05,78.49 225 top
D710  RED  [LED-0603]  123.19,82.3 225 top
D711  RED  [LED-0603]  127,82.3 225 top
D712  RED  [LED-0603]  130.81,82.3 225 top
D713  RED  [LED-0603]  134.62,82.3 225 top
D714  RED  [LED-0603]  138.43,82.3 225 top
D715  RED  [LED-0603]  142.24,82.3 225 top
D716  RED  [LED-0603]  146.05,82.3 225 top
D717  RED  [LED-0603]  138.43,59.44 225 top
D718  RED  [LED-0603]  123.19,86.11 225 top
D719  RED  [LED-0603]  127,86.11 225 top
D720  RED  [LED-0603]  130.81,86.11 225 top
D721  RED  [LED-0603]  134.62,86.11 225 top
D722  RED  [LED-0603]  138.43,86.11 225 top
D723  RED  [LED-0603]  142.24,86.11 225 top
D724  RED  [LED-0603]  146.05,86.11 225 top
D725  RED  [LED-0603]  142.24,59.44 225 top
D726  RED  [LED-0603]  146.05,59.44 225 top
D727  RED  [LED-0603]  123.19,63.25 225 top
D728  RED  [LED-0603]  127,63.25 225 top
D729  RED  [LED-0603]  151.64,59.44 225 top
D730  RED  [LED-0603]  159.26,63.25 225 top
D731  RED  [LED-0603]  163.07,63.25 225 top
D732  RED  [LED-0603]  166.88,63.25 225 top
D733  RED  [LED-0603]  170.69,63.25 225 top
D734  RED  [LED-0603]  174.5,63.25 225 top
D735  RED  [LED-0603]  151.64,67.06 225 top
D736  RED  [LED-0603]  155.45,67.06 225 top
D737  RED  [LED-0603]  159.26,67.06 225 top
D738  RED  [LED-0603]  163.07,67.06 225 top
D739  RED  [LED-0603]  166.88,67.06 225 top
D740  RED  [LED-0603]  155.45,59.44 225 top
D741  RED  [LED-0603]  170.69,67.06 225 top
D742  RED  [LED-0603]  174.5,67.06 225 top
D743  RED  [LED-0603]  151.64,70.87 225 top
D744  RED  [LED-0603]  155.45,70.87 225 top
D745  RED  [LED-0603]  159.26,70.87 225 top
D746  RED  [LED-0603]  163.07,70.87 225 top
D747  RED  [LED-0603]  166.88,70.87 225 top
D748  RED  [LED-0603]  170.69,70.87 225 top
D749  RED  [LED-0603]  174.5,70.87 225 top
D750  RED  [LED-0603]  151.64,74.68 225 top
D751  RED  [LED-0603]  159.26,59.44 225 top
D752  RED  [LED-0603]  155.45,74.68 225 top
D753  RED  [LED-0603]  159.26,74.68 225 top
D754  RED  [LED-0603]  163.07,74.68 225 top
D755  RED  [LED-0603]  166.88,74.68 225 top
D756  RED  [LED-0603]  170.69,74.68 225 top
D757  RED  [LED-0603]  174.5,74.68 225 top
D758  RED  [LED-0603]  151.64,78.49 225 top
D759  RED  [LED-0603]  155.45,78.49 225 top
D760  RED  [LED-0603]  159.26,78.49 225 top
D761  RED  [LED-0603]  163.07,78.49 225 top
D762  RED  [LED-0603]  163.07,59.44 225 top
D763  RED  [LED-0603]  166.88,78.49 225 top
D764  RED  [LED-0603]  170.69,78.49 225 top
D765  RED  [LED-0603]  174.5,78.49 225 top
D766  RED  [LED-0603]  151.64,82.3 225 top
D767  RED  [LED-0603]  155.45,82.3 225 top
D768  RED  [LED-0603]  159.26,82.3 225 top
D769  RED  [LED-0603]  163.07,82.3 225 top
D770  RED  [LED-0603]  166.88,82.3 225 top
D771  RED  [LED-0603]  170.69,82.3 225 top
D772  RED  [LED-0603]  174.5,82.3 225 top
D773  RED  [LED-0603]  166.88,59.44 225 top
D774  RED  [LED-0603]  151.64,86.11 225 top
D775  RED  [LED-0603]  155.45,86.11 225 top
D776  RED  [LED-0603]  159.26,86.11 225 top
D777  RED  [LED-0603]  163.07,86.11 225 top
D778  RED  [LED-0603]  166.88,86.11 225 top
D779  RED  [LED-0603]  170.69,86.11 225 top
D780  RED  [LED-0603]  174.5,86.11 225 top
D781  RED  [LED-0603]  170.69,59.44 225 top
D782  RED  [LED-0603]  174.5,59.44 225 top
D783  RED  [LED-0603]  151.64,63.25 225 top
D784  RED  [LED-0603]  155.45,63.25 225 top
D785  RED  [LED-0603]  180.09,59.44 225 top
D786  RED  [LED-0603]  187.71,63.25 225 top
D787  RED  [LED-0603]  191.52,63.25 225 top
D788  RED  [LED-0603]  195.33,63.25 225 top
D789  RED  [LED-0603]  199.14,63.25 225 top
D790  RED  [LED-0603]  202.95,63.25 225 top
D791  RED  [LED-0603]  180.09,67.06 225 top
D792  RED  [LED-0603]  183.9,67.06 225 top
D793  RED  [LED-0603]  187.71,67.06 225 top
D794  RED  [LED-0603]  191.52,67.06 225 top
D795  RED  [LED-0603]  195.33,67.06 225 top
D796  RED  [LED-0603]  183.9,59.44 225 top
D797  RED  [LED-0603]  199.14,67.06 225 top
D798  RED  [LED-0603]  202.95,67.06 225 top
D799  RED  [LED-0603]  180.09,70.87 225 top
D800  RED  [LED-0603]  183.9,70.87 225 top
D801  RED  [LED-0603]  187.71,70.87 225 top
D802  RED  [LED-0603]  191.52,70.87 225 top
D803  RED  [LED-0603]  195.33,70.87 225 top
D804  RED  [LED-0603]  199.14,70.87 225 top
D805  RED  [LED-0603]  202.95,70.87 225 top
D806  RED  [LED-0603]  180.09,74.68 225 top
D807  RED  [LED-0603]  187.71,59.44 225 top
D808  RED  [LED-0603]  183.9,74.68 225 top
D809  RED  [LED-0603]  187.71,74.68 225 top
D810  RED  [LED-0603]  191.52,74.68 225 top
D811  RED  [LED-0603]  195.33,74.68 225 top
D812  RED  [LED-0603]  199.14,74.68 225 top
D813  RED  [LED-0603]  202.95,74.68 225 top
D814  RED  [LED-0603]  180.09,78.49 225 top
D815  RED  [LED-0603]  183.9,78.49 225 top
D816  RED  [LED-0603]  187.71,78.49 225 top
D817  RED  [LED-0603]  191.52,78.49 225 top
D818  RED  [LED-0603]  191.52,59.44 225 top
D819  RED  [LED-0603]  195.33,78.49 225 top
D820  RED  [LED-0603]  199.14,78.49 225 top
D821  RED  [LED-0603]  202.95,78.49 225 top
D822  RED  [LED-0603]  180.09,82.3 225 top
D823  RED  [LED-0603]  183.9,82.3 225 top
D824  RED  [LED-0603]  187.71,82.3 225 top
D825  RED  [LED-0603]  191.52,82.3 225 top
D826  RED  [LED-0603]  195.33,82.3 225 top
D827  RED  [LED-0603]  199.14,82.3 225 top
D828  RED  [LED-0603]  202.95,82.3 225 top
D829  RED  [LED-0603]  195.33,59.44 225 top
D830  RED  [LED-0603]  180.09,86.11 225 top
D831  RED  [LED-0603]  183.9,86.11 225 top
D832  RED  [LED-0603]  187.71,86.11 225 top
D833  RED  [LED-0603]  191.52,86.11 225 top
D834  RED  [LED-0603]  195.33,86.11 225 top
D835  RED  [LED-0603]  199.14,86.11 225 top
D836  RED  [LED-0603]  202.95,86.11 225 top
D837  RED  [LED-0603]  199.14,59.44 225 top
D838  RED  [LED-0603]  202.95,59.44 225 top
D839  RED  [LED-0603]  180.09,63.25 225 top
D840  RED  [LED-0603]  183.9,63.25 225 top
D841  RED  [LED-0603]  208.53,59.44 225 top
D842  RED  [LED-0603]  216.15,63.25 225 top
D843  RED  [LED-0603]  219.96,63.25 225 top
D844  RED  [LED-0603]  223.77,63.25 225 top
D845  RED  [LED-0603]  227.58,63.25 225 top
D846  RED  [LED-0603]  231.39,63.25 225 top
D847  RED  [LED-0603]  208.53,67.06 225 top
D848  RED  [LED-0603]  212.34,67.06 225 top
D849  RED  [LED-0603]  216.15,67.06 225 top
D850  RED  [LED-0603]  219.96,67.06 225 top
D851  RED  [LED-0603]  223.77,67.06 225 top
D852  RED  [LED-0603]  212.34,59.44 225 top
D853  RED  [LED-0603]  227.58,67.06 225 top
D854  RED  [LED-0603]  231.39,67.06 225 top
D855  RED  [LED-0603]  208.53,70.87 225 top
D856  RED  [LED-0603]  212.34,70.87 225 top
D857  RED  [LED-0603]  216.15,70.87 225 top
D858  RED  [LED-0603]  219.96,70.87 225 top
D859  RED  [LED-0603]  223.77,70.87 225 top
D860  RED  [LED-0603]  227.58,70.87 225 top
D861  RED  [LED-0603]  231.39,70.87 225 top
D862  RED  [LED-0603]  208.53,74.68 225 top
D863  RED  [LED-0603]  216.15,59.44 225 top
D864  RED  [LED-0603]  212.34,74.68 225 top
D865  RED  [LED-0603]  216.15,74.68 225 top
D866  RED  [LED-0603]  219.96,74.68 225 top
D867  RED  [LED-0603]  223.77,74.68 225 top
D868  RED  [LED-0603]  227.58,74.68 225 top
D869  RED  [LED-0603]  231.39,74.68 225 top
D870  RED  [LED-0603]  208.53,78.49 225 top
D871  RED  [LED-0603]  212.34,78.49 225 top
D872  RED  [LED-0603]  216.15,78.49 225 top
D873  RED  [LED-0603]  219.96,78.49 225 top
D874  RED  [LED-0603]  219.96,59.44 225 top
D875  RED  [LED-0603]  223.77,78.49 225 top
D876  RED  [LED-0603]  227.58,78.49 225 top
D877  RED  [LED-0603]  231.39,78.49 225 top
D878  RED  [LED-0603]  208.53,82.3 225 top
D879  RED  [LED-0603]  212.34,82.3 225 top
D880  RED  [LED-0603]  216.15,82.3 225 top
D881  RED  [LED-0603]  219.96,82.3 225 top
D882  RED  [LED-0603]  223.77,82.3 225 top
D883  RED  [LED-0603]  227.58,82.3 225 top
D884  RED  [LED-0603]  231.39,82.3 225 top
D885  RED  [LED-0603]  223.77,59.44 225 top
D886  RED  [LED-0603]  208.53,86.11 225 top
D887  RED  [LED-0603]  212.34,86.11 225 top
D888  RED  [LED-0603]  216.15,86.11 225 top
D889  RED  [LED-0603]  219.96,86.11 225 top
D890  RED  [LED-0603]  223.77,86.11 225 top
D891  RED  [LED-0603]  227.58,86.11 225 top
D892  RED  [LED-0603]  231.39,86.11 225 top
D893  RED  [LED-0603]  227.58,59.44 225 top
D894  RED  [LED-0603]  231.39,59.44 225 top
D895  RED  [LED-0603]  208.53,63.25 225 top
D896  RED  [LED-0603]  212.34,63.25 225 top
D897  RED  [LED-0603]  9.4,103.12 225 top
D898  RED  [LED-0603]  17.02,106.93 225 top
D899  RED  [LED-0603]  20.83,106.93 225 top
D900  RED  [LED-0603]  24.64,106.93 225 top
D901  RED  [LED-0603]  28.45,106.93 225 top
D902  RED  [LED-0603]  32.26,106.93 225 top
D903  RED  [LED-0603]  9.4,110.74 225 top
D904  RED  [LED-0603]  13.21,110.74 225 top
D905  RED  [LED-0603]  17.02,110.74 225 top
D906  RED  [LED-0603]  20.83,110.74 225 top
D907  RED  [LED-0603]  24.64,110.74 225 top
D908  RED  [LED-0603]  13.21,103.12 225 top
D909  RED  [LED-0603]  28.45,110.74 225 top
D910  RED  [LED-0603]  32.26,110.74 225 top
D911  RED  [LED-0603]  9.4,114.55 225 top
D912  RED  [LED-0603]  13.21,114.55 225 top
D913  RED  [LED-0603]  17.02,114.55 225 top
D914  RED  [LED-0603]  20.83,114.55 225 top
D915  RED  [LED-0603]  24.64,114.55 225 top
D916  RED  [LED-0603]  28.45,114.55 225 top
D917  RED  [LED-0603]  32.26,114.55 225 top
D918  RED  [LED-0603]  9.4,118.36 225 top
D919  RED  [LED-0603]  17.02,103.12 225 top
D920  RED  [LED-0603]  13.21,118.36 225 top
D921  RED  [LED-0603]  17.02,118.36 225 top
D922  RED  [LED-0603]  20.83,118.36 225 top
D923  RED  [LED-0603]  24.64,118.36 225 top
D924  RED  [LED-0603]  28.45,118.36 225 top
D925  RED  [LED-0603]  32.26,118.36 225 top
D926  RED  [LED-0603]  9.4,122.17 225 top
D927  RED  [LED-0603]  13.21,122.17 225 top
D928  RED  [LED-0603]  17.02,122.17 225 top
D929  RED  [LED-0603]  20.83,122.17 225 top
D930  RED  [LED-0603]  20.83,103.12 225 top
D931  RED  [LED-0603]  24.64,122.17 225 top
D932  RED  [LED-0603]  28.45,122.17 225 top
D933  RED  [LED-0603]  32.26,122.17 225 top
D934  RED  [LED-0603]  9.4,125.98 225 top
D935  RED  [LED-0603]  13.21,125.98 225 top
D936  RED  [LED-0603]  17.02,125.98 225 top
D937  RED  [LED-0603]  20.83,125.98 225 top
D938  RED  [LED-0603]  24.64,125.98 225 top
D939  RED  [LED-0603]  28.45,125.98 225 top
D940  RED  [LED-0603]  32.26,125.98 225 top
D941  RED  [LED-0603]  24.64,103.12 225 top
D942  RED  [LED-0603]  9.4,129.79 225 top
D943  RED  [LED-0603]  13.21,129.79 225 top
D944  RED  [LED-0603]  17.02,129.79 225 top
D945  RED  [LED-0603]  20.83,129.79 225 top
D946  RED  [LED-0603]  24.64,129.79 225 top
D947  RED  [LED-0603]  28.45,129.79 225 top
D948  RED  [LED-0603]  32.26,129.79 225 top
D949  RED  [LED-0603]  28.45,103.12 225 top
D950  RED  [LED-0603]  32.26,103.12 225 top
D951  RED  [LED-0603]  9.4,106.93 225 top
D952  RED  [LED-0603]  13.21,106.93 225 top
D953  RED  [LED-0603]  37.85,103.12 225 top
D954  RED  [LED-0603]  45.47,106.93 225 top
D955  RED  [LED-0603]  49.28,106.93 225 top
D956  RED  [LED-0603]  53.09,106.93 225 top
D957  RED  [LED-0603]  56.9,106.93 225 top
D958  RED  [LED-0603]  60.71,106.93 225 top
D959  RED  [LED-0603]  37.85,110.74 225 top
D960  RED  [LED-0603]  41.66,110.74 225 top
D961  RED  [LED-0603]  45.47,110.74 225 top
D962  RED  [LED-0603]  49.28,110.74 225 top
D963  RED  [LED-0603]  53.09,110.74 225 top
D964  RED  [LED-0603]  41.66,103.12 225 top
D965  RED  [LED-0603]  56.9,110.74 225 top
D966  RED  [LED-0603]  60.71,110.74 225 top
D967  RED  [LED-0603]  37.85,114.55 225 top
D968  RED  [LED-0603]  41.66,114.55 225 top
D969  RED  [LED-0603]  45.47,114.55 225 top
D970  RED  [LED-0603]  49.28,114.55 225 top
D971  RED  [LED-0603]  53.09,114.55 225 top
D972  RED  [LED-0603]  56.9,114.55 225 top
D973  RED  [LED-0603]  60.71,114.55 225 top
D974  RED  [LED-0603]  37.85,118.36 225 top
D975  RED  [LED-0603]  45.47,103.12 225 top
D976  RED  [LED-0603]  41.66,118.36 225 top
D977  RED  [LED-0603]  45.47,118.36 225 top
D978  RED  [LED-0603]  49.28,118.36 225 top
D979  RED  [LED-0603]  53.09,118.36 225 top
D980  RED  [LED-0603]  56.9,118.36 225 top
D981  RED  [LED-0603]  60.71,118.36 225 top
D982  RED  [LED-0603]  37.85,122.17 225 top
D983  RED  [LED-0603]  41.66,122.17 225 top
D984  RED  [LED-0603]  45.47,122.17 225 top
D985  RED  [LED-0603]  49.28,122.17 225 top
D986  RED  [LED-0603]  49.28,103.12 225 top
D987  RED  [LED-0603]  53.09,122.17 225 top
D988  RED  [LED-0603]  56.9,122.17 225 top
D989  RED  [LED-0603]  60.71,122.17 225 top
D990  RED  [LED-0603]  37.85,125.98 225 top
D991  RED  [LED-0603]  41.66,125.98 225 top
D992  RED  [LED-0603]  45.47,125.98 225 top
D993  RED  [LED-0603]  49.28,125.98 225 top
D994  RED  [LED-0603]  53.09,125.98 225 top
D995  RED  [LED-0603]  56.9,125.98 225 top
D996  RED  [LED-0603]  60.71,125.98 225 top
D997  RED  [LED-0603]  53.09,103.12 225 top
D998  RED  [LED-0603]  37.85,129.79 225 top
D999  RED  [LED-0603]  41.66,129.79 225 top
D1000  RED  [LED-0603]  45.47,129.79 225 top
D1001  RED  [LED-0603]  49.28,129.79 225 top
D1002  RED  [LED-0603]  53.09,129.79 225 top
D1003  RED  [LED-0603]  56.9,129.79 225 top
D1004  RED  [LED-0603]  60.71,129.79 225 top
D1005  RED  [LED-0603]  56.9,103.12 225 top
D1006  RED  [LED-0603]  60.71,103.12 225 top
D1007  RED  [LED-0603]  37.85,106.93 225 top
D1008  RED  [LED-0603]  41.66,106.93 225 top
D1009  RED  [LED-0603]  66.29,103.12 225 top
D1010  RED  [LED-0603]  73.91,106.93 225 top
D1011  RED  [LED-0603]  77.72,106.93 225 top
D1012  RED  [LED-0603]  81.53,106.93 225 top
D1013  RED  [LED-0603]  85.34,106.93 225 top
D1014  RED  [LED-0603]  89.15,106.93 225 top
D1015  RED  [LED-0603]  66.29,110.74 225 top
D1016  RED  [LED-0603]  70.1,110.74 225 top
D1017  RED  [LED-0603]  73.91,110.74 225 top
D1018  RED  [LED-0603]  77.72,110.74 225 top
D1019  RED  [LED-0603]  81.53,110.74 225 top
D1020  RED  [LED-0603]  70.1,103.12 225 top
D1021  RED  [LED-0603]  85.34,110.74 225 top
D1022  RED  [LED-0603]  89.15,110.74 225 top
D1023  RED  [LED-0603]  66.29,114.55 225 top
D1024  RED  [LED-0603]  70.1,114.55 225 top
D1025  RED  [LED-0603]  73.91,114.55 225 top
D1026  RED  [LED-0603]  77.72,114.55 225 top
D1027  RED  [LED-0603]  81.53,114.55 225 top
D1028  RED  [LED-0603]  85.34,114.55 225 top
D1029  RED  [LED-0603]  89.15,114.55 225 top
D1030  RED  [LED-0603]  66.29,118.36 225 top
D1031  RED  [LED-0603]  73.91,103.12 225 top
D1032  RED  [LED-0603]  70.1,118.36 225 top
D1033  RED  [LED-0603]  73.91,118.36 225 top
D1034  RED  [LED-0603]  77.72,118.36 225 top
D1035  RED  [LED-0603]  81.53,118.36 225 top
D1036  RED  [LED-0603]  85.34,118.36 225 top
D1037  RED  [LED-0603]  89.15,118.36 225 top
D1038  RED  [LED-0603]  66.29,122.17 225 top
D1039  RED  [LED-0603]  70.1,122.17 225 top
D1040  RED  [LED-0603]  73.91,122.17 225 top
D1041  RED  [LED-0603]  77.72,122.17 225 top
D1042  RED  [LED-0603]  77.72,103.12 225 top
D1043  RED  [LED-0603]  81.53,122.17 225 top
D1044  RED  [LED-0603]  85.34,122.17 225 top
D1045  RED  [LED-0603]  89.15,122.17 225 top
D1046  RED  [LED-0603]  66.29,125.98 225 top
D1047  RED  [LED-0603]  70.1,125.98 225 top
D1048  RED  [LED-0603]  73.91,125.98 225 top
D1049  RED  [LED-0603]  77.72,125.98 225 top
D1050  RED  [LED-0603]  81.53,125.98 225 top
D1051  RED  [LED-0603]  85.34,125.98 225 top
D1052  RED  [LED-0603]  89.15,125.98 225 top
D1053  RED  [LED-0603]  81.53,103.12 225 top
D1054  RED  [LED-0603]  66.29,129.79 225 top
D1055  RED  [LED-0603]  70.1,129.79 225 top
D1056  RED  [LED-0603]  73.91,129.79 225 top
D1057  RED  [LED-0603]  77.72,129.79 225 top
D1058  RED  [LED-0603]  81.53,129.79 225 top
D1059  RED  [LED-0603]  85.34,129.79 225 top
D1060  RED  [LED-0603]  89.15,129.79 225 top
D1061  RED  [LED-0603]  85.34,103.12 225 top
D1062  RED  [LED-0603]  89.15,103.12 225 top
D1063  RED  [LED-0603]  66.29,106.93 225 top
D1064  RED  [LED-0603]  70.1,106.93 225 top
D1065  RED  [LED-0603]  94.74,103.12 225 top
D1066  RED  [LED-0603]  102.36,106.93 225 top
D1067  RED  [LED-0603]  106.17,106.93 225 top
D1068  RED  [LED-0603]  109.98,106.93 225 top
D1069  RED  [LED-0603]  113.79,106.93 225 top
D1070  RED  [LED-0603]  117.6,106.93 225 top
D1071  RED  [LED-0603]  94.74,110.74 225 top
D1072  RED  [LED-0603]  98.55,110.74 225 top
D1073  RED  [LED-0603]  102.36,110.74 225 top
D1074  RED  [LED-0603]  106.17,110.74 225 top
D1075  RED  [LED-0603]  109.98,110.74 225 top
D1076  RED  [LED-0603]  98.55,103.12 225 top
D1077  RED  [LED-0603]  113.79,110.74 225 top
D1078  RED  [LED-0603]  117.6,110.74 225 top
D1079  RED  [LED-0603]  94.74,114.55 225 top
D1080  RED  [LED-0603]  98.55,114.55 225 top
D1081  RED  [LED-0603]  102.36,114.55 225 top
D1082  RED  [LED-0603]  106.17,114.55 225 top
D1083  RED  [LED-0603]  109.98,114.55 225 top
D1084  RED  [LED-0603]  113.79,114.55 225 top
D1085  RED  [LED-0603]  117.6,114.55 225 top
D1086  RED  [LED-0603]  94.74,118.36 225 top
D1087  RED  [LED-0603]  102.36,103.12 225 top
D1088  RED  [LED-0603]  98.55,118.36 225 top
D1089  RED  [LED-0603]  102.36,118.36 225 top
D1090  RED  [LED-0603]  106.17,118.36 225 top
D1091  RED  [LED-0603]  109.98,118.36 225 top
D1092  RED  [LED-0603]  113.79,118.36 225 top
D1093  RED  [LED-0603]  117.6,118.36 225 top
D1094  RED  [LED-0603]  94.74,122.17 225 top
D1095  RED  [LED-0603]  98.55,122.17 225 top
D1096  RED  [LED-0603]  102.36,122.17 225 top
D1097  RED  [LED-0603]  106.17,122.17 225 top
D1098  RED  [LED-0603]  106.17,103.12 225 top
D1099  RED  [LED-0603]  109.98,122.17 225 top
D1100  RED  [LED-0603]  113.79,122.17 225 top
D1101  RED  [LED-0603]  117.6,122.17 225 top
D1102  RED  [LED-0603]  94.74,125.98 225 top
D1103  RED  [LED-0603]  98.55,125.98 225 top
D1104  RED  [LED-0603]  102.36,125.98 225 top
D1105  RED  [LED-0603]  106.17,125.98 225 top
D1106  RED  [LED-0603]  109.98,125.98 225 top
D1107  RED  [LED-0603]  113.79,125.98 225 top
D1108  RED  [LED-0603]  117.6,125.98 225 top
D1109  RED  [LED-0603]  109.98,103.12 225 top
D1110  RED  [LED-0603]  94.74,129.79 225 top
D1111  RED  [LED-0603]  98.55,129.79 225 top
D1112  RED  [LED-0603]  102.36,129.79 225 top
D1113  RED  [LED-0603]  106.17,129.79 225 top
D1114  RED  [LED-0603]  109.98,129.79 225 top
D1115  RED  [LED-0603]  113.79,129.79 225 top
D1116  RED  [LED-0603]  117.6,129.79 225 top
D1117  RED  [LED-0603]  113.79,103.12 225 top
D1118  RED  [LED-0603]  117.6,103.12 225 top